# EAGLE board led-e-fotorresistor (EAGLE 9.7.0)

Size 190.61 x 150.52 mm. Coordinates in mm from the lower left corner, seen from the top.
Outline: 0,0 190.61,0 190.61,150.52 0,150.52 0,0
Copper layers (1*16): Top 0.035mm / dielectric 1.5mm / Bottom 0.035mm
Design rules "default": minimum track width 6mil, minimum drill 0.35mm, track to track 6mil, track to pad 6mil, pad to pad 6mil, via to via 6mil, smd to smd 6mil, copper to edge 40mil, drill to drill 6mil, minimum pad ring 10mil, minimum via ring 8mil, stop-mask expansion 4mil, vias tented up to drill 0mil, thermal gap 10mil

## Footprints (pad centres in the part's own frame; a part is rotated, then mirrored left to right if it is on the bottom)
BATTERY-GENERIC = drill 1.118 pad 3.15 octagon: + 2.54,0; - -2.54,0
LEDRD254W60D565H860B_G = drill 0.981 pad 1.581: 1 -1.27,0; 2 1.27,0
SENRD254W50D503H320B = drill 0.7 pad 1.3: 1 -1.27,0; 2 1.27,0
RESAD1016W63L850D250B = drill 0.83 pad 1.43: 1 -5.08,0; 2 5.08,0

## Placement (x,y rotation side)
BAT1  9V  [BATTERY-GENERIC]  88.77,65.25 180 top
BAT2  9V  [BATTERY-GENERIC]  88.17,142.26 180 top
BAT3  9V  [BATTERY-GENERIC]  119.25,65.04 180 top
BATBATERIA_1  9V  [BATTERY-GENERIC]  58.38,65.17 180 top
BATBATERIA_2  9V  [BATTERY-GENERIC]  58.23,132.46 180 top
D1  GREEN  [LEDRD254W60D565H860B_G]  26.24,86.71 180 top
D2  GREEN  [LEDRD254W60D565H860B_G]  31.32,86.71 180 top
D3  GREEN  [LEDRD254W60D565H860B_G]  36.4,86.71 180 top
D4  GREEN  [LEDRD254W60D565H860B_G]  96.71,70.6 270 top
D5  GREEN  [LEDRD254W60D565H860B_G]  182.7,88.02 90 top
D6  GREEN  [LEDRD254W60D565H860B_G]  180.16,88.02 90 top
D7  GREEN  [LEDRD254W60D565H860B_G]  177.62,88.02 90 top
D8  GREEN  [LEDRD254W60D565H860B_G]  175.08,88.02 90 top
D9  GREEN  [LEDRD254W60D565H860B_G]  172.54,88.02 90 top
D10  GREEN  [LEDRD254W60D565H860B_G]  170,88.02 90 top
D11  GREEN  [LEDRD254W60D565H860B_G]  167.46,88.02 90 top
D12  GREEN  [LEDRD254W60D565H860B_G]  164.92,88.02 90 top
D14  GREEN  [LEDRD254W60D565H860B_G]  162.38,88.02 90 top
D15  GREEN  [LEDRD254W60D565H860B_G]  159.84,88.02 90 top
D19  GREEN  [LEDRD254W60D565H860B_G]  157.3,88.02 90 top
D20  GREEN  [LEDRD254W60D565H860B_G]  154.76,88.02 90 top
D21  GREEN  [LEDRD254W60D565H860B_G]  152.22,88.02 90 top
D22  GREEN  [LEDRD254W60D565H860B_G]  149.68,88.02 90 top
D23  GREEN  [LEDRD254W60D565H860B_G]  147.14,88.02 90 top
D24  GREEN  [LEDRD254W60D565H860B_G]  144.6,88.02 90 top
D25  GREEN  [LEDRD254W60D565H860B_G]  142.06,88.02 90 top
D26  GREEN  [LEDRD254W60D565H860B_G]  139.52,88.02 90 top
D27  GREEN  [LEDRD254W60D565H860B_G]  136.98,88.02 90 top
D28  GREEN  [LEDRD254W60D565H860B_G]  134.44,88.02 90 top
D30  GREEN  [LEDRD254W60D565H860B_G]  131.9,88.02 90 top
D31  GREEN  [LEDRD254W60D565H860B_G]  129.36,88.02 90 top
D32  GREEN  [LEDRD254W60D565H860B_G]  126.82,88.02 90 top
D33  GREEN  [LEDRD254W60D565H860B_G]  124.28,88.02 90 top
D34  GREEN  [LEDRD254W60D565H860B_G]  116.66,88.02 90 top
D35  GREEN  [LEDRD254W60D565H860B_G]  114.12,88.02 90 top
D36  GREEN  [LEDRD254W60D565H860B_G]  137.33,65.07 180 top
D37  GREEN  [LEDRD254W60D565H860B_G]  137.7,56.84 180 top
D38  GREEN  [LEDRD254W60D565H860B_G]  138.07,48.24 180 top
D39  GREEN  [LEDRD254W60D565H860B_G]  138.39,40.1 180 top
D40  GREEN  [LEDRD254W60D565H860B_G]  138.68,32.08 180 top
D41  GREEN  [LEDRD254W60D565H860B_G]  139.09,24.08 180 top
D42  GREEN  [LEDRD254W60D565H860B_G]  139.34,16.24 180 top
D43  GREEN  [LEDRD254W60D565H860B_G]  139.8,8.05 180 top
DLED1  GREEN  [LEDRD254W60D565H860B_G]  16.22,39.78 180 top
DLED2  GREEN  [LEDRD254W60D565H860B_G]  11.14,39.78 180 top
DLED3  GREEN  [LEDRD254W60D565H860B_G]  6.06,39.78 180 top
Q1  PHOTOTRANSISTOR  [SENRD254W50D503H320B]  110.31,96.91 180 top
Q2  PHOTOTRANSISTOR  [SENRD254W50D503H320B]  31.32,104.49 180 top
Q3  PHOTOTRANSISTOR  [SENRD254W50D503H320B]  36.4,104.49 180 top
Q4  PHOTOTRANSISTOR  [SENRD254W50D503H320B]  88.77,75.41 180 top
Q5  PHOTOTRANSISTOR  [SENRD254W50D503H320B]  129.38,73.32 180 top
QL1  PHOTOTRANSISTOR  [SENRD254W50D503H320B]  18.76,19.46 0 top
QL2  PHOTOTRANSISTOR  [SENRD254W50D503H320B]  13.68,19.46 0 top
QL3  PHOTOTRANSISTOR  [SENRD254W50D503H320B]  8.6,19.46 0 top
R1  1k  [RESAD1016W63L850D250B]  24.97,117.19 90 top
R2  1k  [RESAD1016W63L850D250B]  30.05,117.19 90 top
R3  1k  [RESAD1016W63L850D250B]  35.13,117.19 90 top
R4  1k  [RESAD1016W63L850D250B]  87.5,70.33 90 top
R5  1k  [RESAD1016W63L850D250B]  109.04,101.99 90 top
R6  1k  [RESAD1016W63L850D250B]  123.03,73.32 0 top
RR1  1k  [RESAD1016W63L850D250B]  32.73,27.08 180 top
RR2  1k  [RESAD1016W63L850D250B]  30.19,24.54 180 top
RR3  1k  [RESAD1016W63L850D250B]  27.65,22 180 top

## Library data of the parts
BAT1-BAT3 BATBATERIA_1 BATBATERIA_2 Q1-Q5 QL1-QL3 R1-R6 RR1-RR3 = Tinkercad
D1-D12 D14 D15 D19-D28 D30-D43 DLED1-DLED3 = Tinkercad; CATEGORY: Opto-Electronic; SUB-CATEGORY: LED; VALUE: LED_GREEN

## Nets
BAT1+: BAT1.+ R4.1
BAT1-: BAT1.- D4.2
BAT2+: BAT2.+ Q1.2 R5.1 R5.2
BAT2-: BAT2.- D5.2 D6.2 D7.2 D8.2 D9.2 D10.2 D11.2 D12.2 D14.2 D15.2 D19.2 D20.2 D21.2 D22.2 D23.2 D24.2 D25.2 D26.2 D27.2 D28.2 D30.2 D31.2 D32.2 D33.2 D34.2 D35.2
BAT3+: BAT3.+ R6.1
BAT3-: BAT3.- D36.2 D37.2 D38.2 D39.2 D40.2 D41.2 D42.2 D43.2
BATBATERIA_1+: BATBATERIA_1.+ RR1.1 RR2.1 RR3.1
BATBATERIA_1-: BATBATERIA_1.- DLED1.2 DLED2.2 DLED3.2
BATBATERIA_2+: BATBATERIA_2.+ R1.2 R2.2 R3.2
BATBATERIA_2-: BATBATERIA_2.- D1.2 D2.2 D3.2
Q1_C: Q1.2 R1.1
Q1_E: D1.1 Q1.1
Q1_E: D5.1 D6.1 D7.1 D8.1 D9.1 D10.1 D11.1 D12.1 D14.1 D15.1 D19.1 D20.1 D21.1 D22.1 D23.1 D24.1 D25.1 D26.1 D27.1 D28.1 D30.1 D31.1 D32.1 D33.1 D34.1 D35.1 Q1.1
Q2_C: Q2.2 R2.1
Q2_E: D2.1 Q2.1
Q3_C: Q3.2 R3.1
Q3_E: D3.1 Q3.1
Q4_C: Q4.2 R4.2
Q4_E: D4.1 Q4.1
Q5_C: Q5.2 R6.2
Q5_E: D36.1 D37.1 D38.1 D39.1 D40.1 D41.1 D42.1 D43.1 Q5.1
QL1_C: QL1.2 RR1.2
QL1_E: DLED1.1 QL1.1
QL2_C: QL2.2 RR2.2
QL2_E: DLED2.1 QL2.1
QL3_C: QL3.2 RR3.2
QL3_E: DLED3.1 QL3.1

## Tracks (layer width: path | path; a pad name or v marks a point on that pad's centre or on a via)
BAT1+  (1 unrouted)
BAT1-  (1 unrouted)
BAT2+  (3 unrouted)
BAT2-  (28 unrouted)
BAT3+  (1 unrouted)
BAT3-  (8 unrouted)
BATBATERIA_1+  (3 unrouted)
BATBATERIA_1-  (3 unrouted)
BATBATERIA_2+  (3 unrouted)
BATBATERIA_2-  (3 unrouted)
Q1_C  (1 unrouted)
Q1_E  (1 unrouted)
Q1_E  (28 unrouted)
Q2_C  (1 unrouted)
Q2_E  (1 unrouted)
Q3_C  (1 unrouted)
Q3_E  (1 unrouted)
Q4_C  (1 unrouted)
Q4_E  (1 unrouted)
Q5_C  (1 unrouted)
Q5_E  (8 unrouted)
QL1_C  (1 unrouted)
QL1_E  (1 unrouted)
QL2_C  (1 unrouted)
QL2_E  (1 unrouted)
QL3_C  (1 unrouted)
QL3_E  (1 unrouted)